# Altium PCB NumiClockMicro.PcbDoc
Units mil, origin at the board's own origin, x right, y up, seen from the top; angles counter-clockwise.
Board outline 964.57 x 964.57 mil, 2 copper layers (Top Layer, Bottom Layer); 44 components, 43 nets, 173 pads, 54 vias.
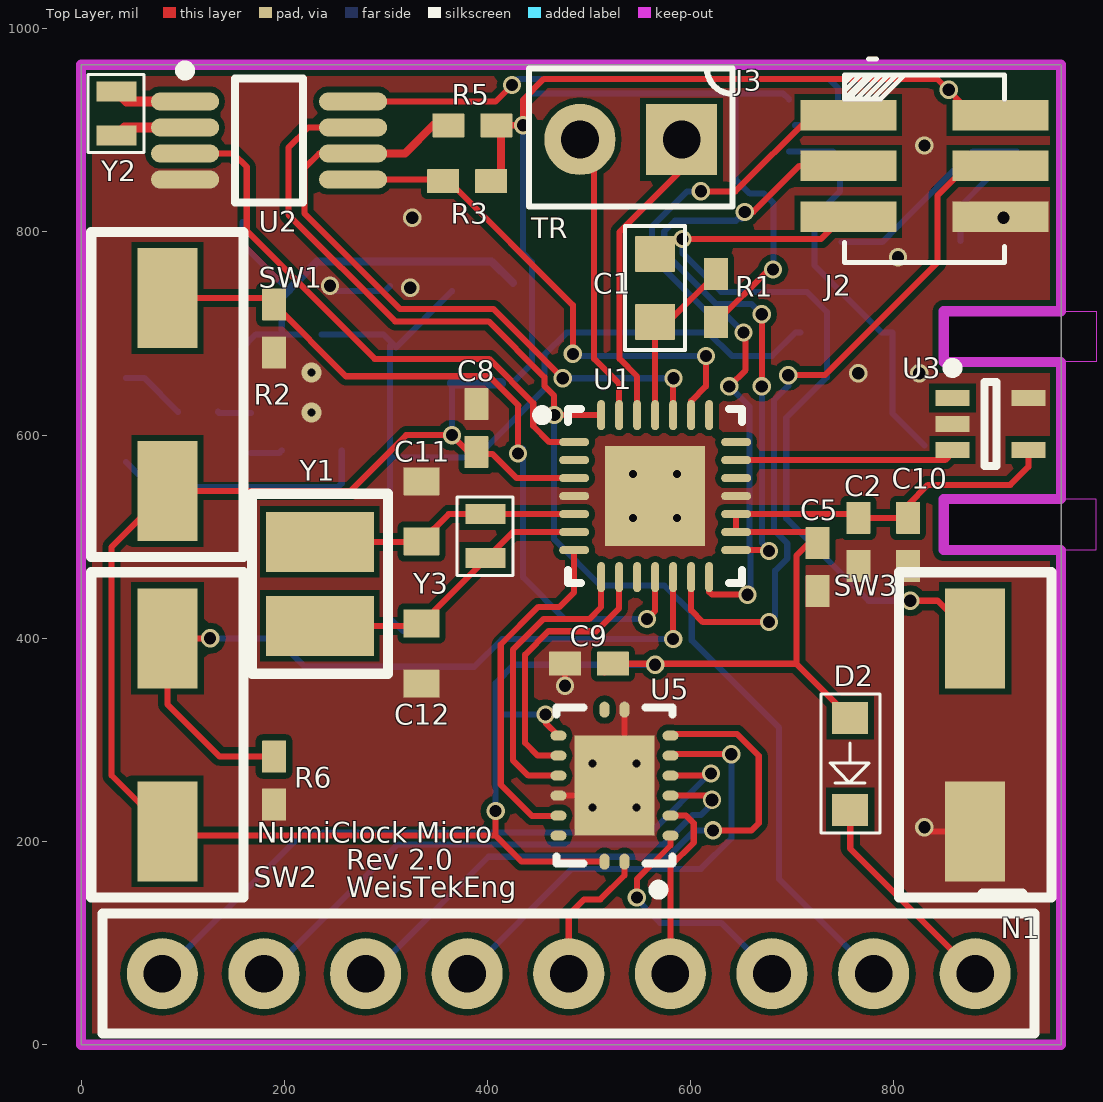
[diagram p0: Top Layer view]
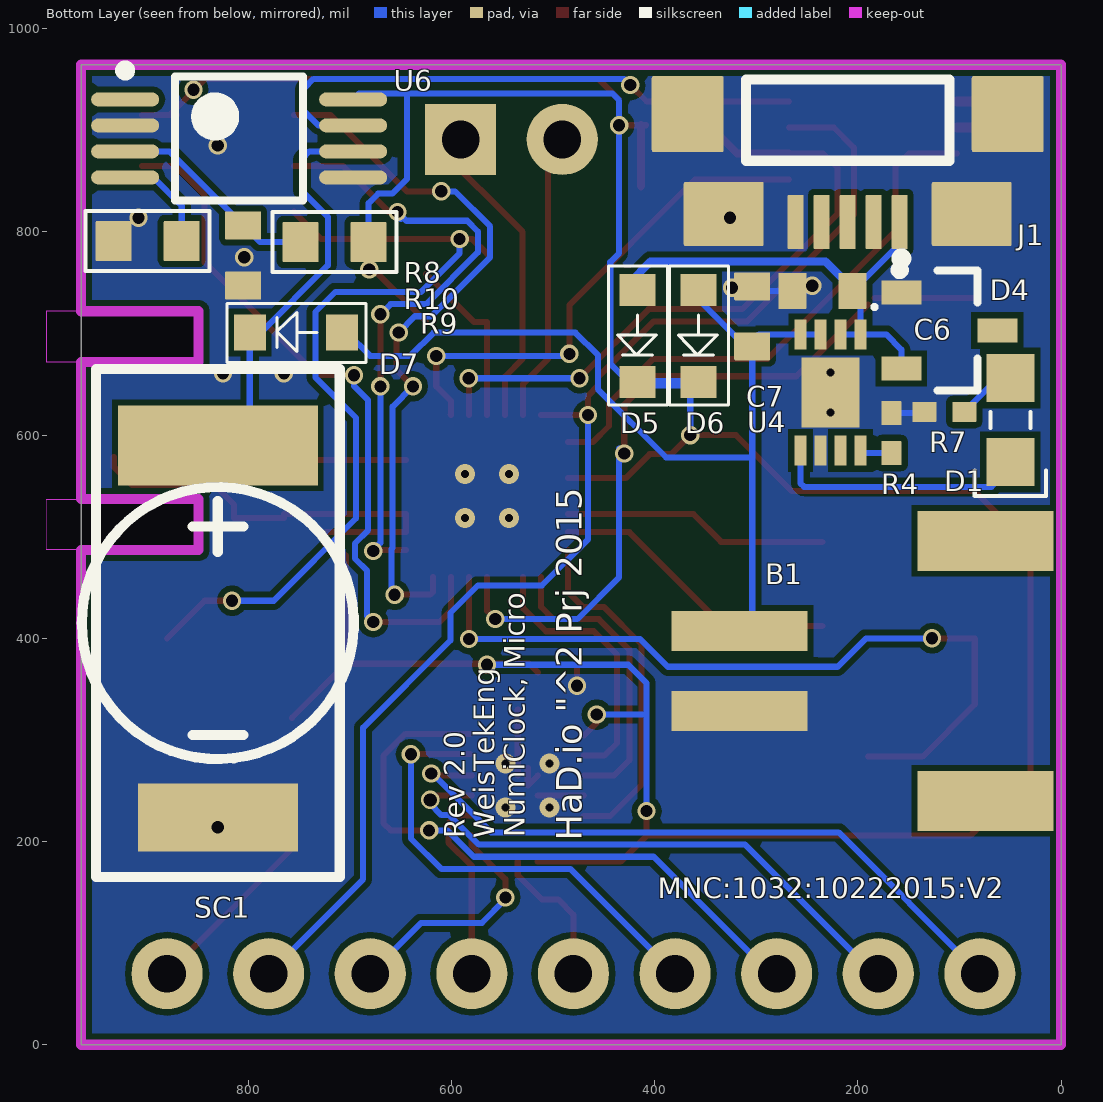
[diagram p1: Bottom Layer view, seen from below]

## Layer stack, top to bottom
Top Solder: solder mask 0.4, Solder Resist, Dk 3.5
Top Layer: signal copper 1.4
Dielectric 1: dielectric 12.6, FR-4, Dk 4.8
Bottom Layer: signal copper 1.4
Bottom Solder: solder mask 0.4, Solder Resist, Dk 3.5

## Board outline
0,0 964.57,0 964.57,964.57 0,964.57 0,0
cut-out: 999,672 849,672 849,722 999,722
cut-out: 999,537 849,537 849,487 999,487

## Design rules (kind name [scope] priority, off if disabled: settings)
Clearance [All] p1: gap=6
PolygonConnect [All] p1: connectstyle=Direct reliefconductorwidth=10 reliefentries=4 polygonreliefangle="90 Angle" airgapwidth=10
RoutingVias [All] p1: holewidth=12 width=18 viastyle="Through Hole" minholewidth=12 minwidth=18 maxholewidth=28 maxwidth=50
SolderMaskExpansion [All] p1: expansion=4
Width [All] p1: maxlimit=10 minlimit=6 preferedwidth=6
30 further rules are at their usual default settings.

## Classes and differential pairs
component class Micro: C1 C2 C5 C8 C9 C10 C11 C12 D2 J2 J3 J8 N1 R1 R2 R3 R5 R6 SW1 SW2 SW3 U1 U2 U3 U5 Y1 Y2 Y3
component class Power: B1 C6 C7 D1 D4 D5 D6 D7 J1 R4 R7 R8 R9 R10 SC1 U4 U6

## Components (designator, comment, footprint, x,y, rotation, side; value= is the part's Value field where it differs from the comment)
B1 "LIPO_400mAh_Sparkfun" LIPO_110mAh 191,373 r270 bottom
C1 "C103_0603_X7R_50V0_5%_Kemet" C1608N 565,745 r270 top
C2 "C104_0402_X7R_16V0_10%_Kemet" C1005N 765,495 r90 top
C5 "C103_0402_X7R_25.0V_5%_Kemet" C1005N 725,470 r90 top
C6 "C475-0603-X5R-20%" C1608L 235,742 r180 bottom
C7 "C475-0603-X5R-20%" C1608L 304,717 r270 bottom
C8 "C103_0402_X7R_25.0V_5%_Kemet" C1005N 389,607 r270 top
C9 "C103_0402_X7R_25.0V_5%_Kemet" C1005N 500,375 r0 top
C10 "C103_0402_X7R_25.0V_5%_Kemet" C1005N 814,495 r90 top
C11 "C120-0603-COG-NPO-5%" C1608L 335,525 r270 top
C12 "C120-0603-COG-NPO-5%" C1608L 335,385 r90 top
D1 "LED-GRN-0805-LUMEX-SML-LXT0805SGW" LEDCP2015X08L 50,615 r270 bottom
D2 "CUS08F30" DIODE-USC 757,321.83 r270 top
D4 "TVS_MMBZ20VALT1G_OnSemi" SOT23_95P237x111-3N 110,703 r180 bottom
D5 "CUS08F30" DIODE-USC 417,743 r270 bottom
D6 "CUS08F30" DIODE-USC 357,743 r270 bottom
D7 "CUS08F30" DIODE-USC 708,701 r0 bottom
J1 "MICRO_USB_AB" "CONN USB_MIcro" 210,920 r270 bottom
J2 "HEADER 3x2 50mil FCI" "3x2 50mil header_FCI" 830,915 r270 top
J3 "HEADER1X2" CONN_2P_SINGLE_100MIL 591,891 r270 top
N1 "IV-9 Numitron Tube" "IV-9 Straight Header" 80,70 r0 top
R1 "10K" C1005N 625,735 r270 top
R2 "10K" C1005N 190,705 r90 top
R3 "R472-0402-1%" C1005N 380,850 r0 top
R4 "R473-0402-5%" C1005L 167,602 r270 bottom
R5 "R472-0402-1%" C1005N 385,905 r0 top
R6 "10K" C1005N 190,260 r90 top
R7 "R331-0402-5%" C1005L 115,623 r180 bottom
R8 "1.24M" C1608N 899,791 r180 bottom
R9 "R123_0603_5%_Panasonic" C1608N 715,790 r180 bottom
R10 "R643R9-0603-1%_Yageo" C1608L 805,777 r90 bottom
SC1 "SUPCAP_330MF_SMD" SUPCAP_330MF 830,590 r180 bottom
SW1 "SPST-NO_6mm_x_3.5mm" SPST_NO_6x3.5 85,640 r90 top
SW2 "SPST-NO_6mm_x_3.5mm" SPST_NO_6x3.5 85,305 r90 top
SW3 "SPST-NO_6mm_x_3.5mm" SPST_NO_6x3.5 880,305 r90 top
U1 "ATmega168A-MMH" 28M1_N 565,540 r0 top
U2 "DS1337U+" U8+1_N 185,890 r0 top
U3 "LM20CIM7/NOPB" MAA05A_N 895,611 r0 top
U4 "MCP73831T-2ATI/MC" DFN-MC8 227,642 r270 bottom
U5 "IC_LS74HC595_TI_QFN" QFN50P350X250X100_HS-17N 525,255 r90 top
U6 "TPS2113APWR" PW8_N 809,892 r180 bottom
Y1 "CRYSTAL_8Mhz_8pF_Micro_NDK" NDK_8MHZ_CRYSTAL 235,495 r270 top
Y2 "32.768KHz" ABS05 35,895 r90 top
Y3 "32.768KHz" ABS05 398,479 r90 top

## Footprints (in the part's own frame and the unit in brackets; to place one, negate y for a bottom-side part, rotate by r counter-clockwise, add the part's x,y. Pads: shape width x height; smd on the part's side, far side on the other; paste and mask are expansions set on the pad)
"3x2 50mil header_FCI" [mm]
  rect 0.76x2.4 smd: 1(0,-1.9) 2(0,1.9) 3(1.27,-1.9) 4(1.27,1.9) 5(2.54,-1.9) 6(2.54,1.9)
  silkscreen extent -1.4,-2 3.68,2
28M1_N [mm] "QFN, 28-Leads, Body 4x4mm, Pitch 0.45mm, Thermal Pad 2.5x2.5mm, IPC Medium Density"
  oval 0.75x0.2 smd: 1(-2.025,1.35) 2(-2.025,0.9) 3(-2.025,0.45) 4(-2.025,0) 5(-2.025,-0.45) 6(-2.025,-0.9) 7(-2.025,-1.35) 15(2.025,-1.35) 16(2.025,-0.9) 17(2.025,-0.45) 18(2.025,0) 19(2.025,0.45) 20(2.025,0.9) 21(2.025,1.35)
  oval 0.2x0.75 smd: 8(-1.35,-2.025) 9(-0.9,-2.025) 10(-0.45,-2.025) 11(0,-2.025) 12(0.45,-2.025) 13(0.9,-2.025) 14(1.35,-2.025) 22(1.35,2.025) 23(0.9,2.025) 24(0.45,2.025) 25(0,2.025) 26(-0.45,2.025) 27(-0.9,2.025) 28(-1.35,2.025)
  rect 2.5x2.5 smd: 29(0,0)
  silkscreen extent -2.95,-2.17 2.17,2.17, body extent -2.02,-2.02 2.02,2.02, height 1
ABS05 [mm] "Crystal 32.7680kHz 20ppm 12.5pF 90 kOhm -40°C - 85°C Surface Mount 2-SMD"
  rect 0.5x1 smd: 1(0,0) 2(1.1,0)
  silkscreen extent -0.43,-0.69 1.52,0.71
C1005L [mm] "Chip, Body 1.0x0.5mm, IPC High Density"
  rrect5% 0.6x0.5 smd mask+0.051: 1(-0.5,0) 2(0.5,0)
  body extent -0.55,-0.3 0.55,0.3, height 0.6
C1005N [mm] "Chip, Body 1.0x0.5mm, IPC Medium Density"
  rrect5% 0.8x0.6 smd mask+0.051: 1(-0.6,0) 2(0.6,0)
  body extent -0.55,-0.3 0.55,0.3, height 0.6
C1608L [mm] "Chip Body 1.6x0.8mm, IPC High Density"
  rrect5% 0.7x0.9 smd mask+0.05: 1(-0.75,0) 2(0.75,0)
  body extent -0.85,-0.48 0.85,0.48, height 0.6
C1608N [mm] "Chip Body 1.6x0.8mm, IPC Medium Density"
  rrect5% 0.9x1 smd mask+0.05: 1(-0.85,0) 2(0.85,0)
  silkscreen extent -1.55,-0.75 1.55,0.75, body extent -0.85,-0.48 0.85,0.48, height 0.6
"CONN USB_MIcro" [mm] "Micro AB - Standard (Bottom mount), Shell SMT"
  rrect5% 1.35x0.4 smd mask+0.051: 1(2.8,1.3) 2(2.8,0.65) 3(2.8,0) 4(2.8,-0.65) 5(2.8,-1.3)
  rrect5% 1.6x2 smd mask+0.051: 6(2.6,3.1) 7(2.6,-3.1)
  rrect5% 1.9x1.8 smd mask+0.051: 8(0.1,4) 9(0.1,-4)
  silkscreen extent -0.76,-2.54 4.1,2.54, body extent -2.33,-3.99 3.1,3.99, height 2.67
CONN_2P_SINGLE_100MIL [mil]
  rect 70x70 hole 37: 1(0,0)
  round 70 hole 37: 2(0,-100)
  silkscreen extent -70,-150 66,50
DFN-MC8 [mm] "SON, 8-Leads, Body 2x3mm, Pitch 0.5mm, Microchip Recommended"
  rect 0.75x0.3 smd: 1(-1.45,0.75) 2(-1.45,0.25) 3(-1.45,-0.25) 4(-1.45,-0.75) 5(1.45,-0.75) 6(1.45,-0.25) 7(1.45,0.25) 8(1.45,0.75)
  rect 1.75x1.45 smd: 9(0,0)
  silkscreen extent -2.18,1.05 -2.09,1.15, body extent -1.55,-1.05 1.55,1.05, height 1
DIODE-USC [mm]
  rect 0.8x0.9 smd: 1(0,0) 2(2.3,0)
  silkscreen extent -0.6,-0.72 2.88,0.75
"IV-9 Straight Header" [mil]
  round 70 hole 37: 1(800,0) 2(700,0) 3(600,0) 4(500,0) 5(400,0) 6(300,0) 7(200,0) 8(100,0) 9(0,0)
  silkscreen extent -59,-59 858,79
LEDCP2015X08L [mm] "Chip LED 2-Leads, Body 2.0x1.5mm, IPC High Density"
  rect 1.2x1.2 smd: 1(-1.05,0) 2(1.05,0)
  silkscreen extent -0.2,-0.89 1.91,0.89, body extent -1.05,-0.8 1.05,0.8, height 0.8
LIPO_110mAh [mm]
  rect 1.5x3.4 smd: 0(-3.123,2.959) 0(3.377,2.959)
  rect 1x3.4 smd: 1(-0.873,-3.191) 2(1.127,-3.191)
  body extent -3.82,-4.19 4.08,4.41, height 5.5
MAA05A_N [mm] "SOT353, 5-Leads, Body 2x1.3mm, Pitch 0.65mm, Lead Span 2.1mm, IPC Medium Density"
  rect 0.85x0.4 smd: 1(-0.95,0.65) 2(-0.95,0) 3(-0.95,-0.65) 4(0.95,-0.65) 5(0.95,0.65)
  silkscreen extent -1.07,-1.05 0.15,1.52, body extent -0.67,-1.05 0.68,1.05, height 1.1
NDK_8MHZ_CRYSTAL [mm]
  rect 1.5x2.7 smd: 1(0,0) 2(2.1,0)
  silkscreen extent -1.2,-1.7 3.3,1.7, body extent -0.85,-1.45 2.95,1.45, height 1
PW8_N [mm] "TSOP, 8-Leads, Body 3x4.4mm, Pitch 0.65mm, IPC Medium Density"
  oval 1.7x0.35 smd: 1(-2.85,0.975) 2(-2.85,0.325) 3(-2.85,-0.325) 4(-2.85,-0.975) 5(2.85,-0.975) 6(2.85,-0.325) 7(2.85,0.325) 8(2.85,0.975)
  silkscreen extent -2.98,-1.55 1.6,1.82, body extent -2.25,-1.55 2.25,1.55, height 1.2
QFN50P350X250X100_HS-17N [mm] "QFN, 16-Leads, Body 3.50x2.50mm, Pitch 0.50mm, Thermal Pad 2.50x2.00mm, IPC Medium Density"
  oval 0.4x0.25 smd: 1(-1.9,-0.25) 8(1.9,-0.25) 9(1.9,0.25) 16(-1.9,0.25)
  oval 0.25x0.4 smd: 2(-1.25,-1.4) 3(-0.75,-1.4) 4(-0.25,-1.4) 5(0.25,-1.4) 6(0.75,-1.4) 7(1.25,-1.4) 10(1.25,1.4) 11(0.75,1.4) 12(0.25,1.4) 13(-0.25,1.4) 14(-0.75,1.4) 15(-1.25,1.4)
  rect 2.5x2 smd: 17(0,0)
  silkscreen extent -2.72,-1.45 1.95,1.45, body extent -1.8,-1.3 1.8,1.3, height 1
SOT23_95P237x111-3N [mm] "SOT23, 3-Leads, Body 2.92x2.37mm, Pitch 0.95mm, IPC Medium Density"
  rect 1x0.6 smd: 1(-1.2,0.95) 2(-1.2,-0.95) 3(1.2,0)
  silkscreen extent -1.33,-1.5 0.7,1.92, body extent -1.4,-1.45 1.4,1.45, height 1.29
SPST_NO_6x3.5 [mm]
  rect 2.5x1.5 smd: 1(-2.413,0) 2(2.413,0)
  silkscreen extent -4.06,-1.91 4.06,1.91, body extent -3.4,-1.75 3.4,1.75, height 5.18
SUPCAP_330MF [mm]
  rect 5x2 smd: 1(0,0)
  rect 4x1.7 smd: 2(0,-9.3)
  silkscreen extent -3.4,-10.79 3.4,1.91, body extent -3.53,-10.92 3.53,2.03, height 3
U8+1_N [mm] "TSOP, 8-Leads, Body 3x3mm, Pitch 0.65mm, IPC Medium Density"
  oval 1.7x0.45 smd: 1(-2.1,0.975) 2(-2.1,0.325) 3(-2.1,-0.325) 4(-2.1,-0.975) 5(2.1,-0.975) 6(2.1,-0.325) 7(2.1,0.325) 8(2.1,0.975)
  silkscreen extent -2.22,-1.55 0.85,1.87, body extent -1.55,-1.55 1.55,1.55, height 1.1

## Part data
B1: "400mAh_Lipo_battery"
C1: "CAP CER 10000PF 50V 5% X7R 0603"
C2: "CAP CER 0.1UF 16V 10% X7R 0402"
C5 C8 C9 C10: "CAP CER 10000PF 25V 5% X7R 0402"
C6 C7: "CAP CER 4.7UF 6.3V 20% X5R 0603"
C11 C12: library part C120-0603-C0G-NPO-5%_TDK, "CAP CER 12PF 50V 5% C0G 0603"
D1: "LED THIN 565NM GRN DIFF 0805 SMD"
D2 D5 D6 D7: library part DIODE-CUS08F30-30v-800MA-USC-Toshiba, "DIODE SCHOTTKY 30V 800MA USC"
D4: "TVS DIODE 17VWM 28VC SOT23"
J1: library part CONN_MICRO_USB_AB
J2: "CONN HEADER 6POS DL UNSHRD SMD"
J3: library part CONN_2P_Header
R1 R2 R6: library part R103_0402_5%_Panasonic, "RES 10K OHM 1/10W 5% 0402 SMD"
R3 R5: "RES 4.7K OHM 1/10W 1% 0402 SMD"
R4: "DEPRECATED - RES 47K OHM 1/10W 5% 0402 SMD"
R8: library part R4.7M-0603-5%-Yageo, "RES SMD 4.7M OHM 5% 1/10W 0603"
R9: "RES SMD 12K OHM 5% 1/10W 0603"
R10: "RES SMD 64.9 OHM 1% 1/10W 0603"
SC1: "CAP 330MF -20% +80% 3.3V SMD"
SW1 SW2 SW3: "SWITCH TACTILE SPST-NO 0.05A 24V"
U1: "8-bit AVR Microcontroller, 16KB Flash, 512 Bytes EEPROM, 1KB SRAM, 28-pin VQFN, Industrial Grade (-40°C to 85°C)"
U2: "I2C Serial Real-Time Clock, 8-Pin uSOP, -40 to 85 degC, Pb-Free"
U3: "2.4V, 10µA Temperature Sensor, 5-pin SC-70 Micro SMD, Pb-Free"
U4: "Miniature Single-Cell, Fully Integrated Li-Ion, Li-Polymer Charge Management Controller, 4.2V, 8-Pin DFN, Industrial Temperature, Tape and Reel"
U5: "IC 8-BIT SHIFT REGISTER 16-DIP"
U6: "Dual In / Single Out Autoswitching Power Mux, 2.8 to 5.5 V, -40 to 85 degC, 8-pin TSSOP (PW), Green (RoHS & no Sb/Br)"
Y1: "Crystal 8.0000MHz 50ppm 8pF 500 Ohm -40°C - 150°C AEC-Q200 Surface Mount 2-SMD"
Y2 Y3: library part CRYSTAL-32.768KHZ_ABS-Micro, "Crystal 32.7680kHz 20ppm 12.5pF 90 kOhm -40°C - 85°C Surface Mount 2-SMD"

## Via types
v1: diameter 18, hole 12, Top Layer to Bottom Layer, tented both sides, 43 vias
v2: diameter 19.68, hole 7.87, Top Layer to Bottom Layer, tented both sides, 10 vias
v3: diameter 18, hole 13, Top Layer to Bottom Layer, tented both sides, 1 vias

## Nets (pads, with @x,y where several pads share a name; then routed paths per layer and width w, separated by ;. In a path a pad name is that pad's centre, name@x,y a point inside that pad or via, vN(x,y) a via of type N, cw(c..) or ccw(c..) an arc to the next point about the centre after c; other vN are vias at no path point)
+3.3V: C2.2 C5.2 C8.2 C9.2 C10.2 D2.1 D5.2 D6.2 J2.2 R1.2 R3.2 R5.2 R9.2 SW1.1 SW2.1 U1.3 U1.16 U1.17 U3.4 U5.10 U5.16 U6.8 | length 4047.4
  Top Layer w6: v1(408,230) 408,205.79 ; R5.2 413.46,905 v1(435,905) 435,930 455.57,950.57 842.43,950.57 878,915 J2.2 J2.2@870,915 ; v1(457,325) 457,317.09 U5.10 ; U1.3 428.66,557.72 405,581.38 383.62,581.38 v1(365,600) 320,600 265,545 SW1.1 30,490 30,265 SW2.1 89.21,205.79 408,205.79 ; U5.16 433.59,180.2 408,205.79 ; C9.2@515.16,366.54 C9.2 704,375 704,481.37 716.26,493.62 C5.2 ; R1.2 676.62,763 v1(681,763) ; 702.92,375.92 D2.1 ; C5.2@724.06,504.57 U1.16 U1.17 C2.2@765,522.28 ; C2.2 C10.2 814,531.6 833.4,551 914.62,551 932.4,568.78 U3.4@932.4,578.41
  Top Layer w8: R3.2@413.46,845 R5.2@413.46,905
  Bottom Layer w6: v1(365,600) D6.2@365,651 ; v1(408,230) 408,325 ; D5.2@425,651.45 443.72,670.17 443.72,770.28 435,779 v1(435,905) 435,929.57 441.82,936.39 644,936.39 ; v1(457,325) 408,325 ; v1(565,374) 426,374 408,356 408,325 ; v1(681,763) 681.54,763.54 R9.2 681.54,828.46 672.28,837.72 658.28,837.72 644,852 644,936.39 ; U6.8 690.8,936.39 644,936.39
  Bottom Layer w10: D6.2@365,651 D5.2@413.45,651
  other v1: 854,940
\RESET: C1.1 J2.5 SW3.2 | length 842
  Top Layer w6: C1.1 579.54,793 728.2,793 J2.5@755.2,820 ; v1(816,437) 843,437 SW3.2
  Bottom Layer w6: v1(592,793) 592,779 630,741 714.19,741 734,721.19 734,657 694,617 694,518 775,437 v1(816,437)
\WP: U1.22
ALARM: U1.21
CHARGE: B1.1 C7.2 D6.1 D7.1 U4.3 U4.4 | length 935.8
  Bottom Layer w6: U4.3 U4.4 297.39,699.09 310,686.47 365,741.47 D6.1@365,742 ; C7.2 304,578 ; B1.1 304,420 304,578 ; D7.1 703,701 680,678 640.46,678 617.46,701 478,701 456,679 456,645.26 388.74,578 304,578
CLOCK: U1.9 U5.11 | length 267.2
  Top Layer w6: U5.11 449.47,284.53 437,297 437,384 460,407 507,407 529.57,429.57 U1.9
DATA: U1.7 U5.14 | length 342.8
  Top Layer w6: U5.14@469.88,225 444,225 413,256 413,393.94 450.06,431 471,431 485.28,445.28 U1.7
DS_XIN: U2.1 Y2.2 | length 71.4
  Top Layer w10: Y2.2 44.92,928.39 U2.1
DS_XOUT: U2.2 Y2.1 | length 70.6
  Top Layer w10: Y2.1 42.8,902.8 U2.2
FREQ_ADJ: U1.19
GND: B1.2 C2.1 C5.1 C6.1 C7.1 C8.1 C9.1 C10.1 C11.1 C12.1 D4.1 J1.5 J1.6 J1.7 J1.8 J1.9 J2.6 R2.1 R4.1 R6.1 R7.1 R8.1 R10.1 SC1.2 SW3.1 U1.4 U1.18 U1.29 U2.4 U3.2 U3.5 U4.6 U4.9 U5.8 U5.13 U5.17 U6.2 U6.5 | length 323.6
  Top Layer w6: v1@239,748 240,747 v1(245,747) ; U5.13 U5.17@515.16,245.16 ; v1(476.38,353.38) C9.1 ; U5.17@515.16,264.84 U5.17 U5.17@525,272.43 ; U5.17@534.84,264.84 U5.8 ; v1(830,214) 834,210 SW3.1 ; J2.6 905.8,814 v1(908,814)
  Bottom Layer w6: R7.1 136,621.68 R4.1 ; v1(245,747) 245,742 C6.1 299.47,742 C7.1
  other v1: 765,661 825,661 324,745 804,775 326,814 830,885
  other v2: 503.35,233.35 546.65,233.35 503.35,276.65 546.65,276.65 543.35,518.35 586.65,518.35 543.35,561.65 586.65,561.65 227,622.32 227,661.68
INTA: U1.1 U2.3 | length 550.7
  Top Layer w6: U2.3 149.8,877.2 163,864 163,801 289,675 401.53,675 445,631.53 445,609 460.85,593.15 U1.1
LATCH: U1.8 U5.12 | length 293.8
  Top Layer w6: U5.12 440.16,264.84 425,280 425,388.97 455.03,419 500,419 511.85,430.85 U1.8
LM35: U1.20 U3.3 | length 216.4
  Top Layer w6: U1.20 850.43,575.43 U3.3@858,583
MEGA_XIN: C11.2 U1.5 Y1.1 Y3.2 | length 261.6
  Top Layer w6: Y1.1 334.53,495 C11.2 361.81,522.28 U1.5
MEGA_XOUT: C12.2 U1.6 Y1.2 Y3.1 | length 288.5
  Top Layer w6: Y1.2 332.8,412.32 C12.2 425.04,504.57 U1.6
MISO: J2.1 U1.14 | length 718.5
  Top Layer w6: v1(610,840) 644,840 719,915 J2.1 ; U1.14 618.15,445.85 621,443 v1(656,443) ; v1(638,648) 654,664 654,699 v1(652,701)
  Bottom Layer w6: v1(610,840) 596.57,840 562,805.43 562,775.06 620.06,717 636,717 v1(652,701) ; v1(638,648) 658,628 658,489.03 659,488.03 659,446 v1(656,443)
MOSI: J2.4 U1.13 | length 708.5
  Top Layer w6: U1.13 600.43,427.57 612,416 v1(677,416) ; v1(696,659) 732,659 843,770 843,836 872,865 J2.4
  Bottom Layer w6: v1(677,416) 683,422 683,466.54 695,478.54 695,493.46 682,506.46 682,634.54 696,648.54 v1(696,659)
NetC1_2: C1.2 R1.1 U1.25 | length 171.3
  Top Layer w6: U1.25 C1.2 577.91,711.54 R1.1
NetC6_2: C6.2 D4.2 D5.1 J1.1 U4.1 U4.2 | length 457.5
  Bottom Layer w6: D4.2 157.24,684.24 172.09,699.09 U4.1 ; J1.1 158.82,788.18 205,742 C6.2 197.47,734 U4.1 ; U4.2 U4.1
  Bottom Layer w8: C6.2@205.47,744.47 232,771 404,771 D5.1@425,750
NetD1_1: D1.1 R7.2 | length 65.1
  Bottom Layer w6: D1.1@44,656.34 61.98,656.34 R7.2
NetD1_2: D1.2 U4.5 | length 256.6
  Bottom Layer w6: D1.2@44,573.66 68.66,549 253,549 256.53,552.53 U4.5
NetD2_2: D2.2 N1.1 | length 212.2
  Top Layer w6: D2.2 757,193 N1.1
NetD7_2: D7.2 SC1.1 U6.6 | length 396.8
  Bottom Layer w6: U6.6 739.8,879.2 747,872 747,840 721.75,814.75 721.75,767.11 787.85,701 D7.2 798.55,621.45 SC1.1
NetR4_2: R4.2 U4.8 | length 31.5
  Bottom Layer w6: R4.2 194.87,582.31 U4.8
NetR8_2: R8.2 U6.4 | length 101.8
  Bottom Layer w6: R8.2 865.54,825.54 893.61,853.61 U6.4
NetR9_1: R9.1 R10.2 U6.3 | length 209.7
  Bottom Layer w6: R9.1 788.47,790 R10.2 877.68,879.2 U6.3
NEXT_BTN: R6.2 SW2.2 U1.12 | length 772.9
  Top Layer w6: v1(127,400) SW2.2 85,335 136.38,283.62 R6.2 ; v1(582.72,399.28) U1.12
  Bottom Layer w6: v1(127,400) 192,400 220,372 387,372 414.28,399.28 v1(582.72,399.28)
PPS: N1.2 U1.28 U2.7 | length 1260.5
  Top Layer w6: U2.7 223.8,902.8 204,883 204,817.03 309.03,712 401.03,712 456,657.03 456,648.54 465.63,638.92 v1(465.63,619.72) U1.28
  Bottom Layer w6: v1(465.63,619.72) 465.63,497.37 511,452 574,452 601,425 601,398 687,312 687,163 N1.2
RTCVCC: U2.8 U6.7 | length 561
  Top Layer w6: U2.8 407.93,928.39 v1(424.11,944.57)
  Bottom Layer w6: v1(424.11,944.57) 430.11,950.57 736,950.57 745,941.57 745,919 731,905 U6.7@702.59,905
RXD: J3.1 U1.26 | length 307.6
  Top Layer w6: U1.26 547.28,657.72 530,675 530,800 J3.1@615,885
SCK: J2.3 U1.15 | length 627.6
  Top Layer w6: U1.15 676.15,486.85 v1(677,486) ; v1(653.16,819.72) 661.72,819.72 707,865 J2.3 ; v1(670,648) v1(670,719)
  Bottom Layer w6: v1@650,813 653.16,816.16 v1(653.16,819.72) 644.44,811 584.54,811 574,800.46 574,780.03 625.03,729 660,729 v1(670,719) ; v1(670,648) 670,494 678,486 v1(677,486)
SCL: R5.1 U1.24 U2.6 | length 656.8
  Top Layer w6: U2.6 234.2,877.2 220,863 220,818 314,724 406,724 v1(474,656) ; R5.1@360,905 R5.1 ; U1.24 582.72,655.72 v1(583,656)
  Top Layer w8: U2.6 318.74,877.2 R5.1@346.54,905
  Bottom Layer w6: v1(474,656) v1(583,656)
SDA: R3.1 U1.23 U2.5 | length 512.3
  Top Layer w6: U2.5 360.39,851.61 484,728 v1(484,680) ; U1.23@600.87,620.16 U1.23 600.43,633.43 615,648 v1(615,678)
  Bottom Layer w6: v1(484,680) 486,678 v1(615,678)
SEG_A: N1.5 U5.1 | length 142.3
  Top Layer w6: N1.5 480,128 495,143 511,143 534.84,166.84 U5.1
SEG_B: N1.3 U5.2 | length 239.7
  Top Layer w6: v1(547,145) 547,163 580.12,196.12 U5.2
  Bottom Layer w6: v1(547,145) 547,143 570,120 630,120 N1.3
SEG_C: N1.4 U5.3 | length 183.5
  Top Layer w6: N1.4 580.12,70.12 580.12,176.12 603,199 603,218 595.53,225.47 U5.3
SEG_D: N1.8 U5.4 | length 559.2
  Top Layer w6: U5.4 618.43,245.16 618.43,241 v3(621,241)
  Bottom Layer w6: N1.8 184,70 311,197 573.06,197 602,225.94 609.94,225.94 621,237 v3(621,241)
SEG_E: N1.9 U5.5 | length 666.5
  Top Layer w6: U5.5 617.84,264.84 v1(620,267) v1@620,262.87
  Bottom Layer w6: N1.9 219,209 561,209 619,267 v1(620,267)
SEG_F: N1.6 U5.6 | length 456.5
  Top Layer w6: U5.6@581.59,286 v1(640,286)
  Bottom Layer w6: N1.6 483,173 610,173 640,203 v1(640,286)
SEG_G: N1.7 U5.7 | length 614.8
  Top Layer w6: U5.7@581.91,306 645.46,306 667,284.46 667,218 660,211 v1(622,211) v1@616,211
  Bottom Layer w6: N1.7 286,70 401,185 578.03,185 604.03,211 v1(622,211)
SELECT_BTN: R2.2 SW1.2 U1.11 | length 745.1
  Top Layer w6: SW1.2 R2.2@183.62,735 ; R2.2 260.62,658 401.56,658 430.28,629.28 430,629 v1(430,582) ; v1(557,419) 565,427 U1.11
  Bottom Layer w6: v1(430,582) 435,587 435,460 476,419 v1(557,419)
TXD: J3.2 U1.27 | length 291.3
  Top Layer w6: J3.2@491,895 505,881 505,675 529.57,650.43 U1.27
pads on no net: B1.0 D4.3 J1.2 J1.3 J1.4 U1.2 U1.10 U3.1 U4.7 U5.9 U5.15 U6.1

## Polygon pours and split planes (outlines as drawn)
GND on Top Layer "Top Layer-GND" (solid, remove dead copper, pour order 0): 0,0 964.57,0 964.57,964.57 0,964.57 0,0
GND on Bottom Layer "Bottom Layer-GND" (solid, remove dead copper, pour order 1): 0,0 964.57,0 964.57,964.57 0,964.57 0,0

## Keep-outs
Keep-Out Layer:
  lines w10: 0,0 0,964.57 964.57,964.57 964.57,722 849,722 849,672 964.57,672 964.57,537 849,537 849,487 964.57,487 964.57,0 0,0

## Silkscreen, mask and mechanical layers (free items; w line width, h text height)
Top Overlay:
  text "TR" at 443,794 h20
  text "NumiClock Micro" at 173,199 h20
  text "Rev 2.0" at 261,172 h20
  text "WeisTekEng" at 261,145 h20
Bottom Overlay:
  text "NumiClock, Micro" at 528,204 h20 r270
  text "WeisTekEng" at 558,203 h20 r270
  text "Rev 2.0" at 587,203 h20 r270
  text "HaD.io \"^2 Prj 2015" at 472,201 h25 r270
  text "MNC:1032:10222015:V2" at 397,144 h20
Mechanical 1:
  lines w10: 0,0 0,964.57 964.57,964.57 964.57,722 849,722 849,672 964.57,672 964.57,537 849,537 849,487 964.57,487 964.57,0 0,0

## Dimensions
0,964.57 to 965,965 on Mechanical 15
965,965 to 965,0 on Mechanical 15